# EAGLE board QFN-breakout-board (EAGLE 6.6.0)
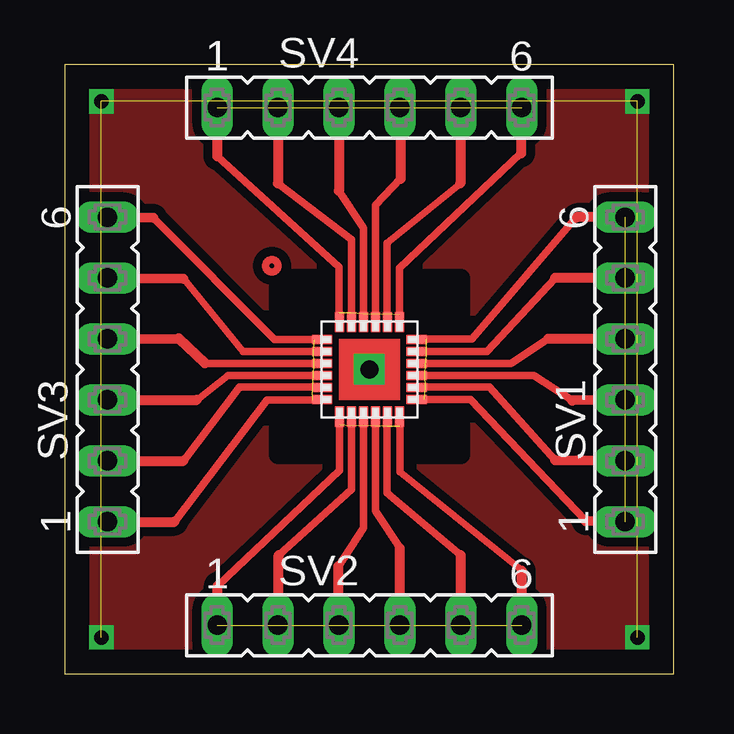
[diagram p0: board, top side]

Size 25.4 x 25.4 mm. Coordinates in mm from the lower left corner, seen from the top.
Outline: 0,0 25.4,0 25.4,25.4 0,25.4 0,0
Copper layers (1*16): Top 0.035mm / dielectric 1.5mm / Bottom 0.035mm
Design rules "default": minimum track width 10mil, minimum drill 24mil, track to track 8mil, track to pad 8mil, pad to pad 8mil, via to via 8mil, smd to smd 8mil, copper to edge 40mil, drill to drill 8mil, minimum pad ring 10mil, minimum via ring 8mil, stop-mask expansion 4mil, vias tented up to drill 0mil, thermal gap 10mil
tRestrict: area 8.9,9.1 to 16.5,16.5

## Footprints (pad centres in the part's own frame; a part is rotated, then mirrored left to right if it is on the bottom)
FE06 = drill 0.813 long: 1 -6.35,0; 2 -3.81,0; 3 -1.27,0; 4 1.27,0; 5 3.81,0; 6 6.35,0
QFN.24.4X4 = smd 0.85 x 0.38: 1 -1.975,1.25; 2 -1.975,0.75; 3 -1.975,0.25; 4 -1.975,-0.25; 5 -1.975,-0.75; 6 -1.975,-1.25; 13 1.975,-1.25; 14 1.975,-0.75; 15 1.975,-0.25; 16 1.975,0.25; 17 1.975,0.75; 18 1.975,1.25 | smd 0.38 x 0.85: 7 -1.25,-1.975; 8 -0.75,-1.975; 9 -0.25,-1.975; 10 0.25,-1.975; 11 0.75,-1.975; 12 1.25,-1.975; 19 1.25,1.975; 20 0.75,1.975; 21 0.25,1.975; 22 -0.25,1.975; 23 -0.75,1.975; 24 -1.25,1.975 | drill 0.762 square: P$1 0,0

## Placement (x,y rotation side)
SV1  [FE06]  23.37,12.7 90 top
SV2  [FE06]  12.7,2.03 0 top
SV3  [FE06]  1.78,12.7 90 top
SV4  [FE06]  12.7,23.62 0 top
U$1  MPU-6050  [QFN.24.4X4]  12.7,12.7 0 top

## Library data of the parts
SV1-SV4 = con-lsta; OC_FARNELL: unknown; OC_NEWARK: unknown
U$1 = invensense

## Nets
N$2: SV3.1 SV3.2 SV3.3 SV3.4 SV3.5 SV3.6
N$3: SV4.1 SV4.2 SV4.3 SV4.4 SV4.5 SV4.6
N$4: SV2.1 SV2.2 SV2.3 SV2.4 SV2.5 SV2.6
N$5: SV1.1 SV1.2 SV1.3 SV1.4 SV1.5 SV1.6

## Tracks (layer width: path | path; a pad name or v marks a point on that pad's centre or on a via)
N$1  (5 unrouted)
  Top 0.305: 21.72,6.38 16.92,11.46 14.99,11.46 | 20.45,8.91 17.7,11.96 15.04,11.96 | 21.16,11.4 19.56,12.45 15.01,12.45 | 20.14,13.97 18.59,12.95 15.04,12.95 | 20.45,16.51 17.6,13.44 15.06,13.44 | 21.34,19.05 16.97,13.97 15.06,13.97
  Top 0.406: 24.13,6.35 21.72,6.38 | 24.13,8.89 20.45,8.91 | 24.13,11.43 21.16,11.4 | 24.13,13.97 20.14,13.97 | 24.13,16.51 20.45,16.51 | 24.13,19.05 21.34,19.05
N$2  (5 unrouted)
  Top 0.305: 3.68,19.02 8.74,13.95 10.41,13.95 | 4.95,16.48 7.44,13.44 10.36,13.44 | 5.84,12.95 10.39,12.95 | 5.51,11.43 6.81,12.45 10.36,12.45 | 4.95,8.89 7.29,11.96 10.34,11.96 | 4.57,6.35 8.43,11.43 10.34,11.43
  Top 0.406: SV3.6 3.68,19.02 | SV3.5 4.95,16.48 | SV3.4 4.75,13.99 5.84,12.95 | SV3.3 5.51,11.43 | SV3.2 4.95,8.89 | SV3.1 4.57,6.35
N$3  (5 unrouted)
N$4  (5 unrouted)
N$5  (5 unrouted)
N$6  (5 unrouted)
  Top 0.305: 6.38,3.68 11.46,8.48 11.46,10.41 | 8.91,4.95 11.96,7.7 11.96,10.36 | 11.4,4.5 12.45,6.1 12.45,10.39 | 13.97,5.26 12.95,6.81 12.95,10.36 | 16.51,4.95 13.44,7.54 13.44,10.34 | 19.05,4.32 13.97,8.43 13.97,10.34
  Top 0.406: 6.35,1.27 6.38,3.68 | 8.89,1.27 8.91,4.95 | 11.43,1.27 11.4,4.5 | 13.97,1.27 13.97,5.26 | 16.51,1.27 16.51,4.95 | 19.05,1.27 19.05,4.32
N$7  (5 unrouted)
  Top 0.305: 19.02,21.72 13.95,16.92 13.95,14.99 | 16.48,20.45 13.44,17.96 13.44,15.04 | 13.99,20.65 12.95,19.56 12.95,15.01 | 11.43,20.14 12.45,18.59 12.45,15.04 | 8.89,20.45 11.96,18.11 11.96,15.06 | 6.35,21.59 11.43,16.97 11.43,15.06
  Top 0.406: 19.05,24.13 19.02,21.72 | 16.51,24.13 16.48,20.45 | 13.97,24.13 13.99,20.65 | 11.43,24.13 11.43,20.14 | 8.89,24.13 8.89,20.45 | 6.35,24.13 6.35,21.59
N$8  (via drill 0.6)  (3 unrouted)
  other vias: 1.52,1.52 23.88,1.52 23.88,23.88 1.52,23.88
  pour Top (isolate 0.381, no thermals): 25.4,0 25.4,25.4 0,25.4 0,0
(copper drawn outside any net)
  shapes: Top circle x1